# Altium PCB hlk.PcbDoc
Units mil, origin at the board's own origin, x right, y up, seen from the top; angles counter-clockwise.
Board outline 1646.27 x 2015.87 mil, 2 copper layers (Top Layer, Bottom Layer); 14 components, 20 nets, 76 pads, 11 vias.
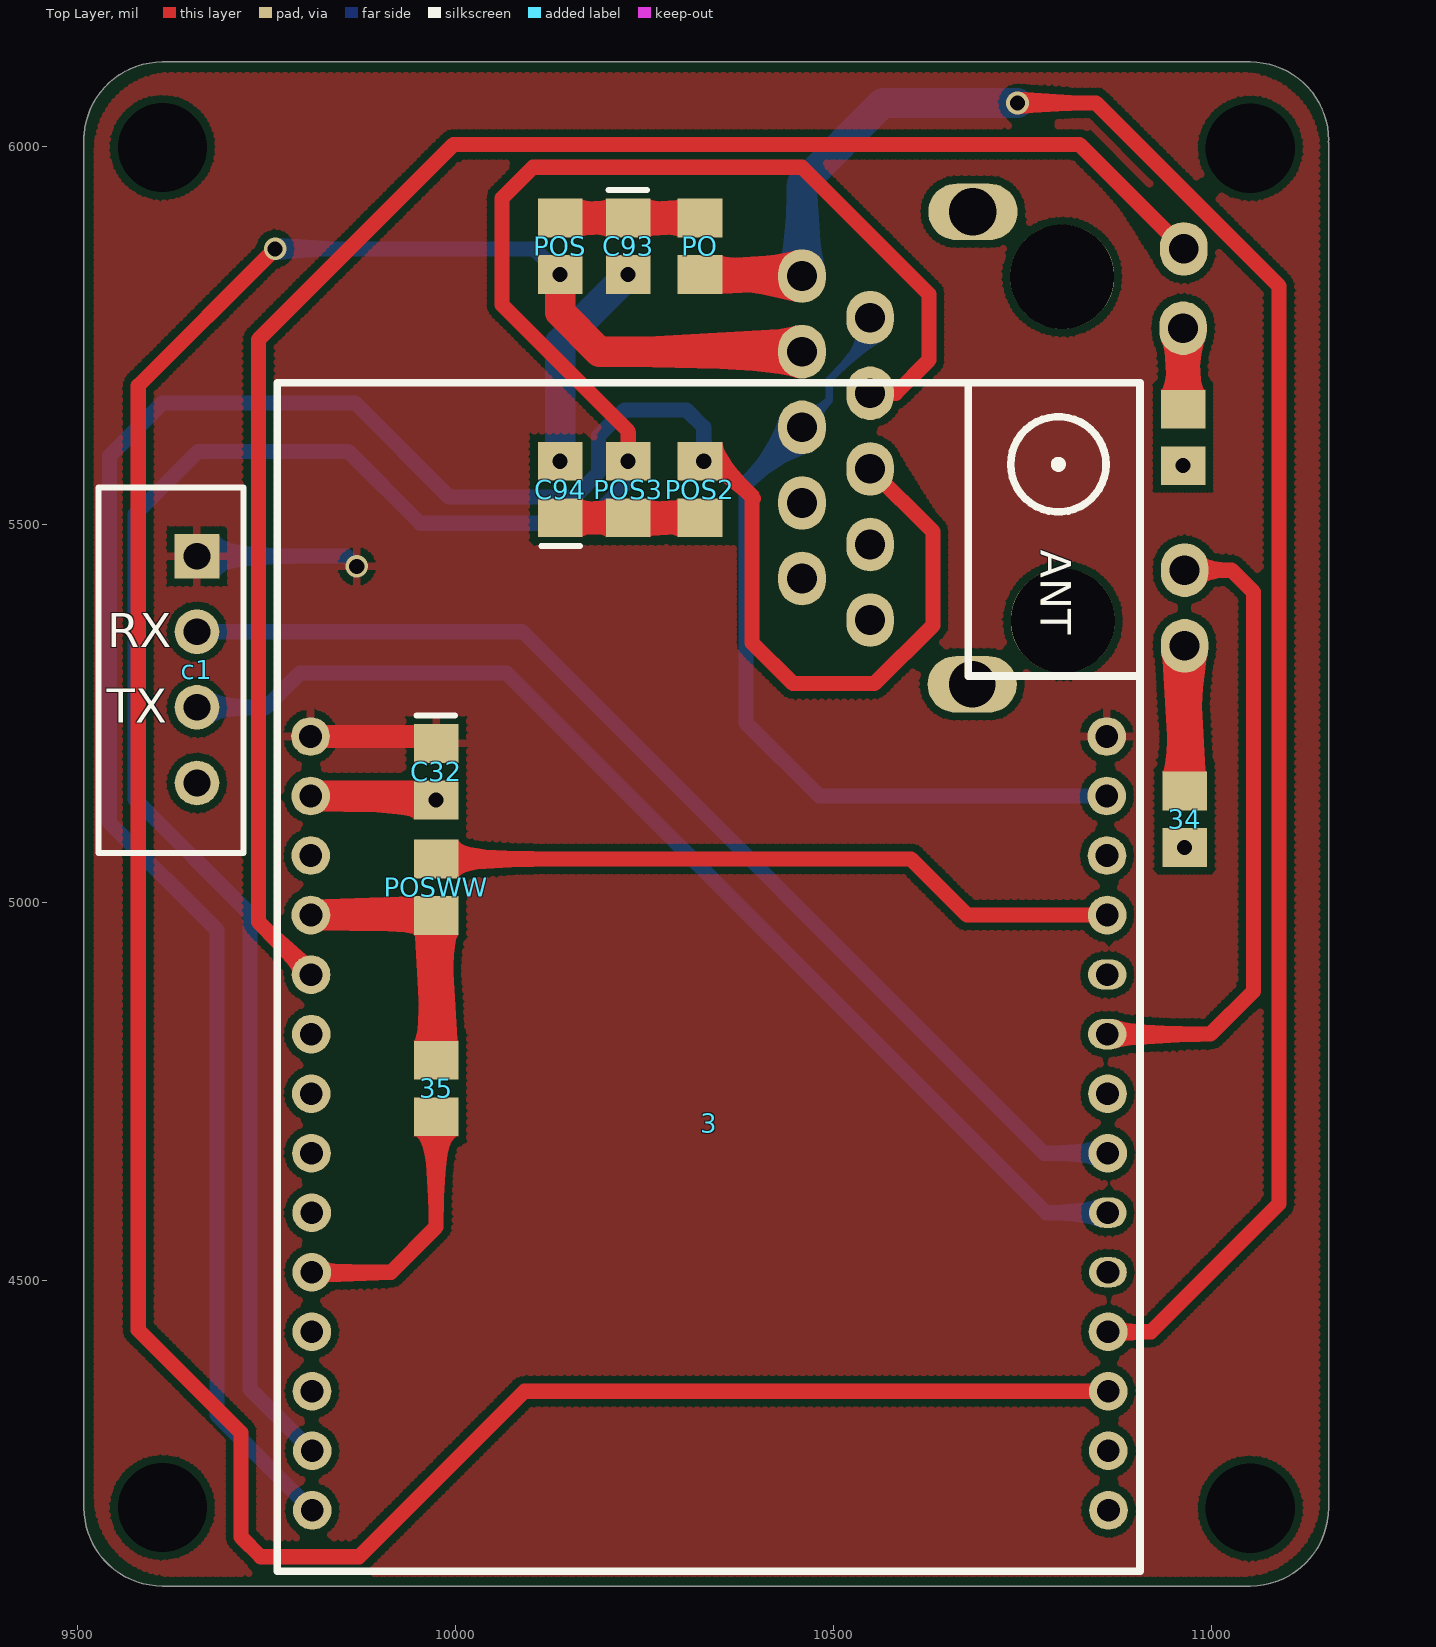
[diagram p0: Top Layer view]
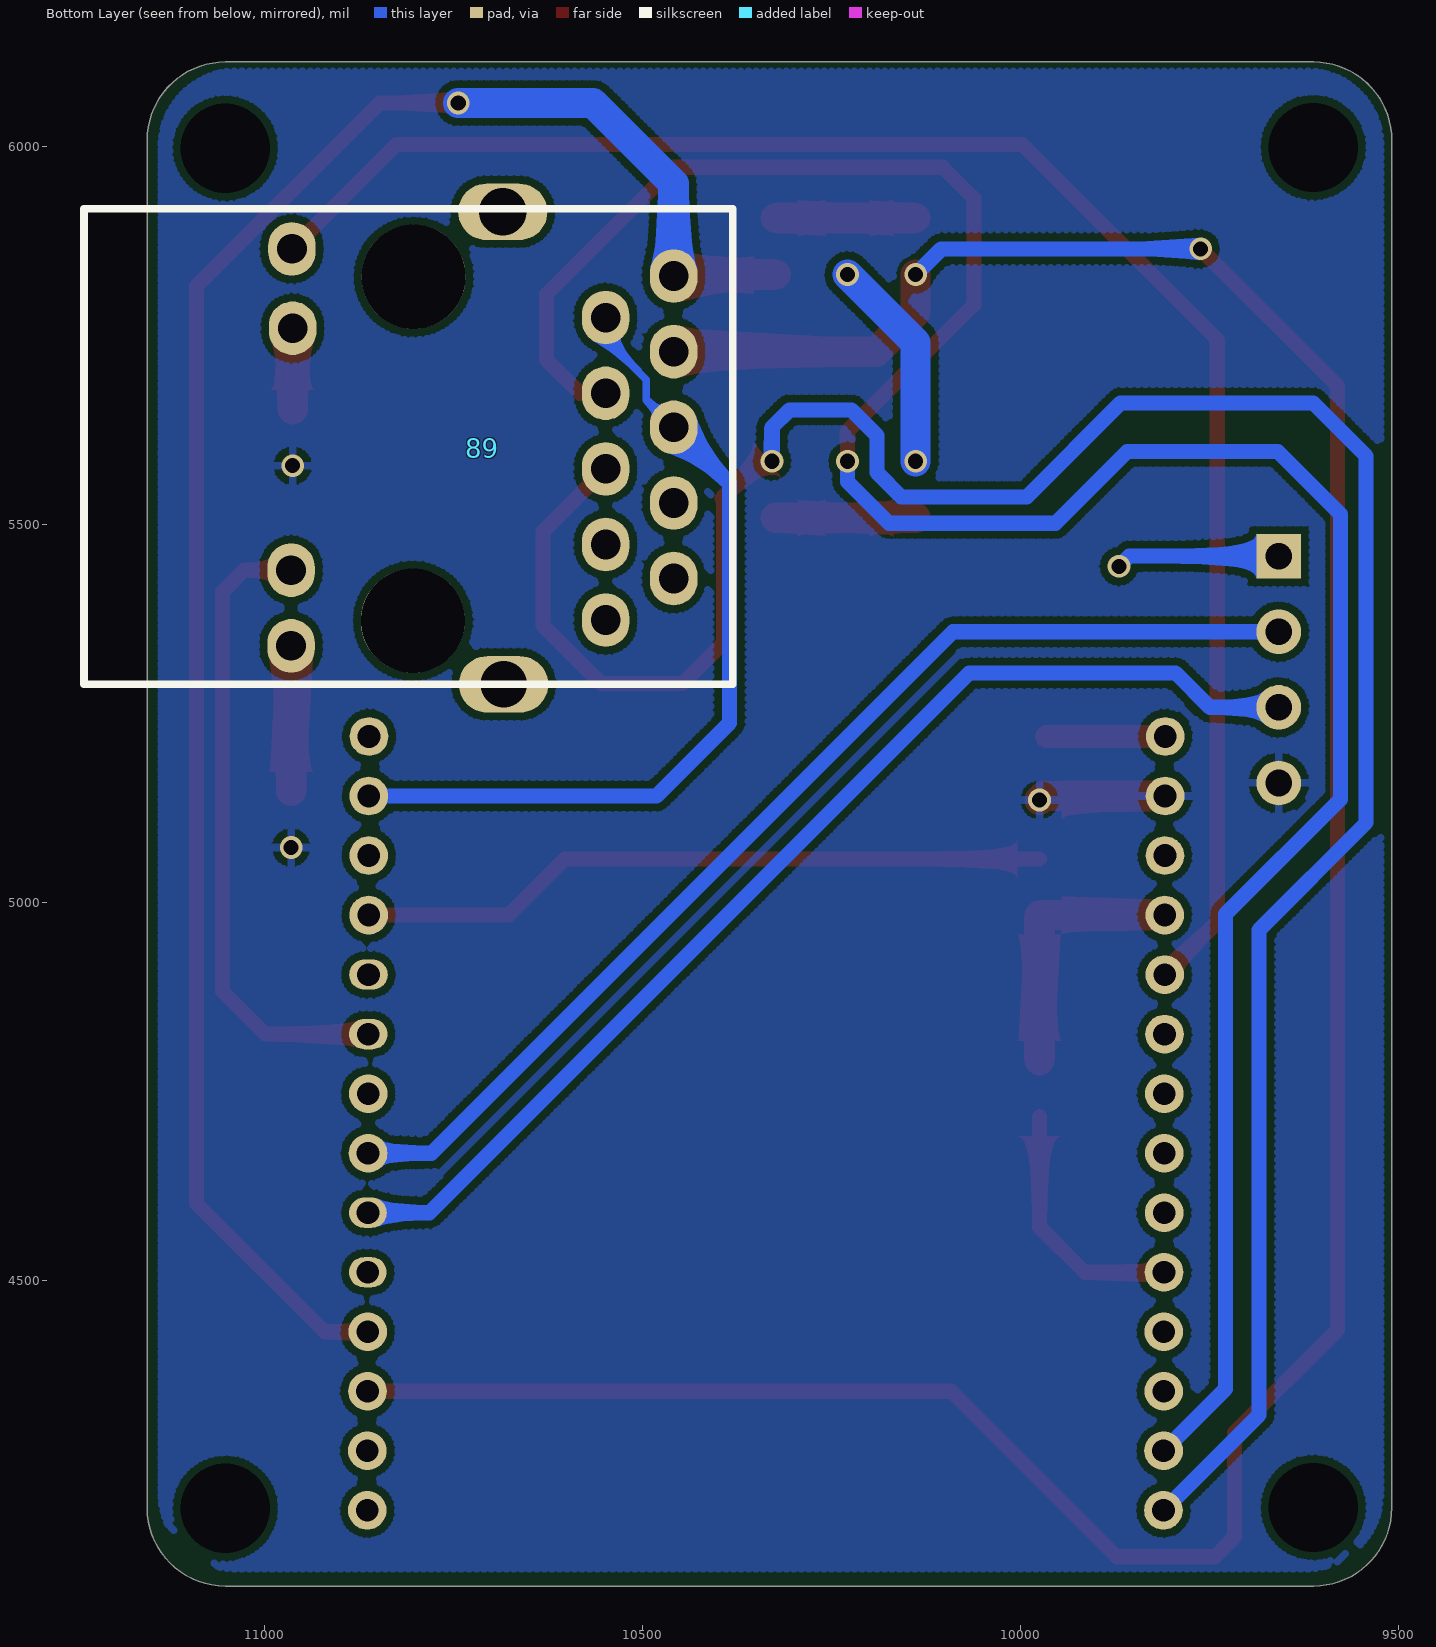
[diagram p1: Bottom Layer view, seen from below]
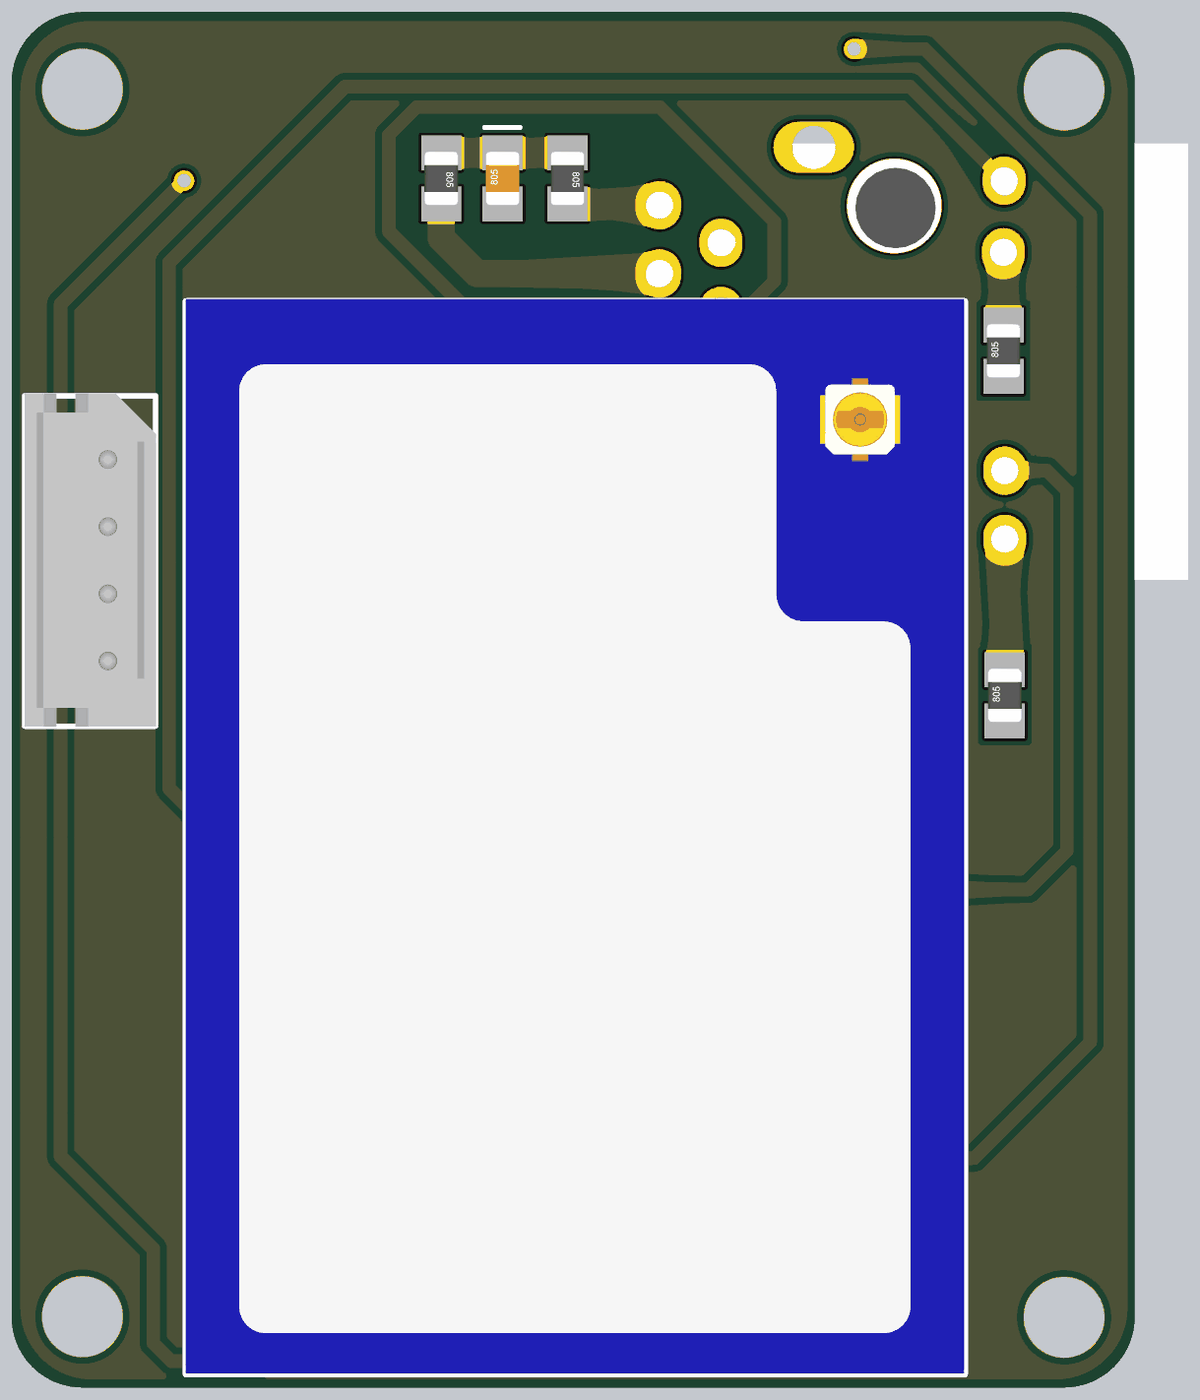
[diagram p2: 3D render of the assembled board from above, using the file's embedded part models]

## Layer stack, top to bottom
Top Solder: solder mask 0.4, Solder Resist, Dk 3.5
Top Layer: signal copper 1.4
Dielectric 1: dielectric 12.6, FR-4, Dk 4.8
Bottom Layer: signal copper 1.4
Bottom Solder: solder mask 0.4, Solder Resist, Dk 3.5

## Board outline
9509.19,4199.75 9509.19,6015 cw(c9514.2,6015) 9509.5,6016.73 cw(c9612.63,6008.75) 9612.63,6112.19 11052.02,6112.19 cw(c11052.02,6008.75) 11155.46,6008.75 cw(c11150.45,6008.75) 11155.1,6006.87 cw(c11150.45,6005) 11155.46,6005 11155.46,4199.75 cw(c11052.02,4199.75) 11052.02,4096.31 9612.63,4096.31 cw(c9612.63,4199.75)

## Design rules (kind name [scope] priority, off if disabled: settings)
Clearance [All] p1: gap=10
PolygonConnect [All] p1: connectstyle=Relief reliefconductorwidth=10 reliefentries=4 polygonreliefangle="90 Angle" airgapwidth=10
RoutingVias [All] p1: holewidth=28 width=50 viastyle="Through Hole" minholewidth=28 minwidth=50 maxholewidth=28 maxwidth=50
SolderMaskExpansion [All] p1: expansion=4
Width [All] p1: maxlimit=60 minlimit=10 preferedwidth=10
30 further rules are at their usual default settings.

## Classes and differential pairs
component class HLK: 3 34 35 89 c1 C32 C93 C94 PO POS POS2 POS3 POSWW

## Components (designator, comment, footprint, x,y, rotation, side; value= is the part's Value field where it differs from the comment)
3 "HLK_WifiModule" HLK 9810,4195 r0 top
34 "330" R0805 10965,5075 r90 top
35 "330R" R0805 9975,4790 r270 top
43 "330" R0805 10963,5580 r90 top
89 "RJ45_B" RJ45_B 11140,5665 r270 bottom
c1 "SPOX1*4" SPOX_1*4RIGHT 9645,5450 r270 top
C32 "100NF" Cap0805 9975,5136 r90 top
C93 "100nf" Cap0805 10229,5831 r90 top
C94 "100nf" Cap0805 10139,5584 r270 top
PO "51" R0805 10324,5904 r270 top
POS "51" R0805 10139,5904 r270 top
POS2 "51" R0805 10324,5511 r90 top
POS3 "51" R0805 10229,5511 r90 top
POSWW "1K" R0805 9975,4985 r90 top

## Footprints (in the part's own frame and the unit in brackets; to place one, negate y for a bottom-side part, rotate by r counter-clockwise, add the part's x,y. Pads: shape width x height; smd on the part's side, far side on the other; paste and mask are expansions set on the pad)
Cap0805 [mm]
  rect 1.3x1.5 smd: 1(0,0) 2(1.9,0)
  silkscreen extent 2.84,-0.63 2.84,0.67, body extent -0.05,-0.62 1.95,0.63, height 0.78
HLK [mm]
  round 1.3 hole 0.762: 1(-0.03,26.035) 2(-0.025,24.035) 3(-0.021,22.035) 4(-0.016,20.035) 5(-0.012,18.035) 6(-0.007,16.035) 7(-0.002,14.035) 8(0.002,12.035) 9(0.007,10.035) 10(0.011,8.035) 11(0.016,6.035) 12(0.021,4.035) 13(0.025,2.035) 14(0.03,0.035) 15(26.78,0.035) 16(26.775,2.035) 17(26.771,4.035) 18(26.766,6.035) 21(26.752,12.035) 22(26.748,14.035) 25(26.734,20.035) 26(26.729,22.035) 27(26.725,24.035) 28(26.72,26.035)
  oval 1.27x1.016 hole 0.762: 19(26.761,8.035) 20(26.757,10.035)
  oval 1.3x1.016 hole 0.762: 23(26.743,16.035) 24(26.738,18.035)
  silkscreen extent -1.14,-2.01 27.84,37.92, body extent -1.17,-1.99 27.83,38.01, height 5.25
R0805 [mm]
  rect 1.3x1.5 smd: 1(-0.046,0) 2(1.854,0)
  body extent -0.1,-0.62 1.9,0.63, height 0.78
RJ45_B [mm]
  oval 1.8x1.6 hole 1: 1(-4.166,17.297) 2(-2.769,15.011) 3(-1.626,17.297) 4(-0.229,15.011) 5(0.914,17.297) 6(2.311,15.011) 7(3.454,17.297) 8(4.851,15.011) 9(5.994,17.297) 10(7.391,15.011) 11(-5.08,4.47) 12(-2.413,4.496) 13(5.715,4.445) 14(8.255,4.445)
  oval 1.9x3 hole 1.6: 15(-6.325,11.557)
  oval 1.9x3 hole 1.56: 16(9.55,11.582)
  round 3.5 hole 3.5: ""(-4.14,8.56) ""(7.417,8.534)
  silkscreen extent -6.43,-2.51 9.55,19.28, body extent -6.48,-2.39 9.78,19.2, height 14.36
SPOX_1*4RIGHT [mm]
  rect 1.5x1.5 hole 0.9: 1(-0.217,0.346)
  round 1.5 hole 0.9: 2(2.323,0.346) 3(4.863,0.346) 4(7.403,0.346)
  silkscreen extent -2.53,-2.97 9.76,1.91, body extent -2.61,-2.97 9.79,1.93, height 5.95

## Part data
34 35 43 PO POS POS2 POS3 POSWW: library part R0805
C32 C93 C94: library part Cap0805, "surface mount capacitor (size 805)"

## Free pads (board coordinates)
  round 60 hole 118.11: 0(9612.95,4200.08) 0(9612.95,5999.08) 0(11051.95,4199.08) 0(11051.95,5998.08)

## Via types
v1: diameter 30, hole 20, Top Layer to Bottom Layer, 11 vias

## Nets (pads, with @x,y where several pads share a name; then routed paths per layer and width w, separated by ;. In a path a pad name is that pad's centre, name@x,y a point inside that pad or via, vN(x,y) a via of type N, cw(c..) or ccw(c..) an arc to the next point about the centre after c; other vN are vias at no path point)
3.3V: 3.4 35.1 POSWW.1 | length 357.3
  Top Layer w40: 3.4 9974.42,4983.78 POSWW.1 35.1
GND: 3.2 34.1 43.1 c1.4 C32.1 | length 168.2
  Top Layer w40: 3.2 9969.74,5141.26 v1(9975,5136)
  other v1: 10965,5073.2 10963,5578.2
LED_GW: 3.23 89.13 | length 847.6
  Top Layer w20: 3.23 10999.3,4826.3 11056,4883 11056,5411 11027,5440 89.13
LED_YW: 3.5 89.11 | length 2256.8
  Top Layer w20: 3.5 9740,4974.58 9740,5745 9998,6003 10826,6003 89.11
Net3_25: 3.25 POSWW.2 | length 918.3
  Top Layer w20: POSWW.2 10603,5058 10677.22,4983.78 3.25
Net34_2: 34.2 89.14 | length 192
  Top Layer w40: 34.2 89.14
Net43_2: 43.2 89.12 | length 107
  Top Layer w40: 43.2 89.12
NetC93_1: C93.1 C94.1 | length 284.3
  Bottom Layer w40: v1(10139,5584) 10139,5741 v1(10229,5831)
NetC93_2: C93.2 PO.1 POS.1 | length 185
  Top Layer w40: POS.1 C93.2 PO.1
NetC94_2: C94.2 POS2.1 POS3.1 | length 185
  Top Layer w40: C94.2 POS3.1 POS2.1
RD+: 3.13 89.4 POS3.2 | length 3363.3
  Top Layer w20: v1(10229,5584) 10229,5624 10062,5791 10062,5932 10103,5973 10459,5973 10627,5805 10627,5718 10583,5674 89.4
  Bottom Layer w20: 3.13 9729,4357.11 9729,4985 9577,5137 9577,5514 9660,5597 9859,5597 9954,5502 10174,5502 10229,5557 v1(10229,5584)
RD-: 3.14 89.6 POS2.2 | length 3320.7
  Top Layer w20: POS2.2 10346,5584 10395,5535 10393,5533 10393,5344 10447,5290 10555,5290 10632,5367 10632,5491 89.6
  Bottom Layer w20: 3.14 9685,4322.55 9685,4964 9543,5106 9543,5591 9613,5661 9868,5661 9992,5537 10158,5537 10190,5569 10190,5618 10224,5652 10306,5652 10329,5629 v1(10329,5584)
TD+: 3.18 89.1 PO.2 | length 2543.6
  Top Layer w20: v1(10744,6058) 10847.76,6058 11090,5815.76 11090,4602 10920.6,4432.6 3.18
  Top Layer w40: PO.2 10457,5831 89.1
  Bottom Layer w40: 89.1 10459,5951 10566,6058 v1(10744,6058)
TD-: 3.17 89.3 POS.2 | length 3866.3
  Top Layer w20: v1(9762,5865) 9581,5684 9581,4435 9717,4299 9717,4161 9743,4135 9873,4135 10091.86,4353.86 3.17
  Top Layer w40: v1(10139,5831) 10139,5781 10191,5729 89.3
  Bottom Layer w20: v1(9762,5865) 10105,5865 v1(10139,5831)
VCC: 3.1 3.28 c1.1 C32.2 | length 374
  Top Layer w30: 3.1 C32.2@9965.8,5220
  Bottom Layer w20: c1.1 9856.46,5458.54 v1(9870,5445)
VCC-1.8V: 3.27 89.2 89.5 | length 1121.2
  Bottom Layer w10: 89.5 10495,5665 10495,5692 10549,5746 89.2
  Bottom Layer w20: 89.5 10385,5555 10385,5238 10481.74,5141.26 3.27
W_RST: 3.10 35.2 | length 335.3
  Top Layer w20: 3.10 9915.34,4511.34 9975,4571 35.2
W_RX: 3.20 c1.3 | length 1519.3
  Bottom Layer w20: c1.3 9749.54,5258.54 9795,5304 10068,5304 10781.92,4590.08 3.20
W_TX: 3.21 c1.2 | length 1490.3
  Bottom Layer w20: c1.2 10089.46,5358.54 10779.18,4668.82 3.21
WLANLED: 3.3
pads on no net: 3.6 3.7 3.8 3.9 3.11 3.12 3.15 3.16 3.19 3.22 3.24 3.26 89. 89.7 89.8 89.9 89.10 89.15 89.16

## Polygon pours and split planes (outlines as drawn)
VCC on Top Layer "VCC_L01_P008" (hatched 45Degree grid 0 track 10, remove dead copper, pour order 8): 9527,5977 9527,5994 cw(c9624.5,5996.5) 9622,6094 9782,6094 11040,6094 cw(c11040,5994) 11140,5994 11140,5951 11140,4213 cw(c11040,4213) 11040,4113 11031,4113 9627,4113 cw(c9627,4213) 9527,4213 9527,4280
GND on Bottom Layer "GND_L02_P012" (hatched 45Degree grid 0 track 10, remove dead copper, pour order 12): 9524,5983 9524,6000 cw(c9621.5,6002.5) 9619,6100 9779,6100 11037,6100 cw(c11037,6000) 11137,6000 11137,5957 11137,4219 cw(c11037,4219) 11037,4119 11028,4119 9624,4119 cw(c9624,4219) 9524,4219 9524,4286

## Silkscreen, mask and mechanical layers (free items; w line width, h text height)
Top Overlay:
  text "RX" at 9540,5338 h45
  text "TX" at 9539,5238 h45
Bottom Solder:
  circle w10: c9612.63,5998.75 r59.06
Mechanical 1:
  circle w10: c11052.02,5998.75 r59.06
  circle w10: c11052.02,4199.75 r59.06
  circle w10: c9612.63,4199.75 r59.06
  lines w10: 9514.2,6008.75 cw(c9612.63,6008.75) 9612.63,6107.17 11052.02,6107.17 cw(c11052.02,6008.75) 11150.45,6008.75 ; 9514.2,6015 9514.2,4199.75 ccw(c9612.63,4199.75) 9612.63,4101.33 11052.02,4101.33 ccw(c11052.02,4199.75) 11150.45,4199.75 11150.45,6005

## Text inside footprints (layer, text, board x,y; h text height)
3: Top Overlay "ANT" at 10775,5467 h40 r270